# Altium PCB Pcb_BAT_HOLD_V2_GLC_RULES.PcbDoc
Units mm, origin at the board's own origin, x right, y up, seen from the top; angles counter-clockwise.
Board outline 100 x 70 mm, 2 copper layers (Top Layer, Bottom Layer); 2 components, 28 nets, 14 pads, 0 vias.
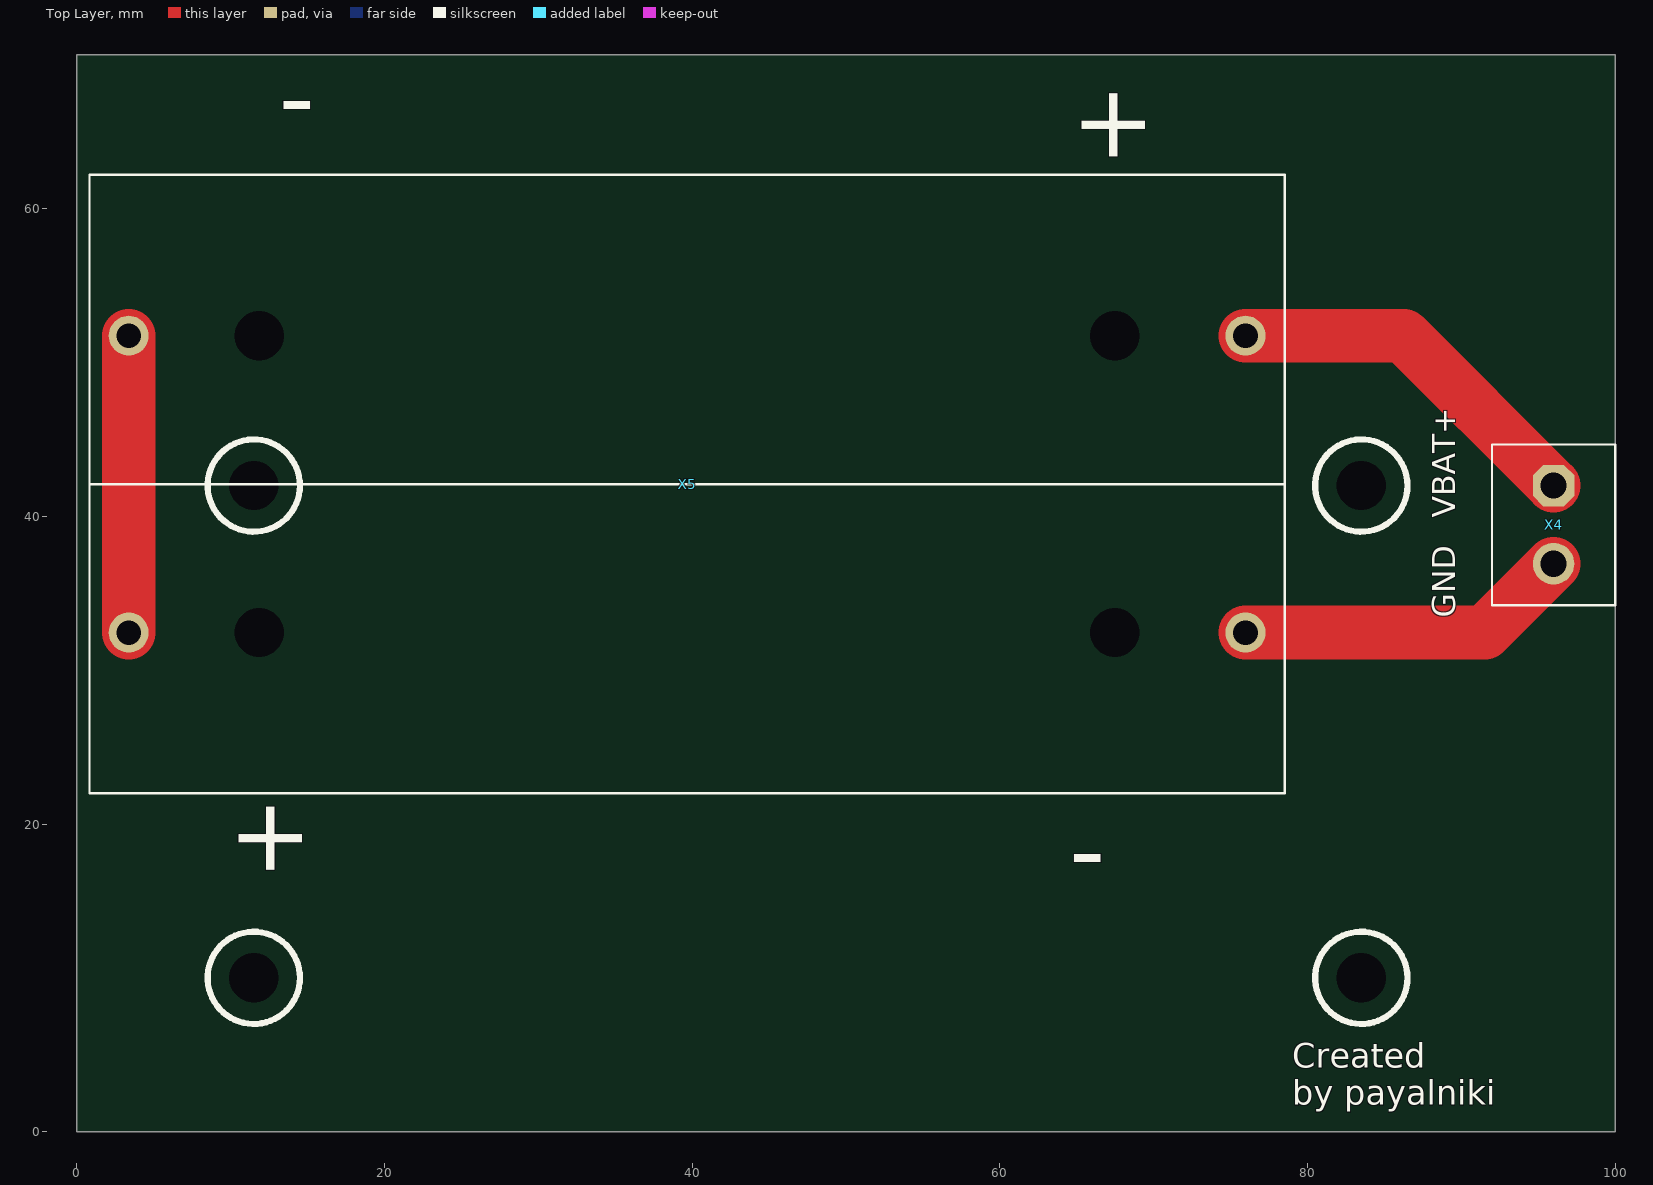
[diagram p0: Top Layer view]
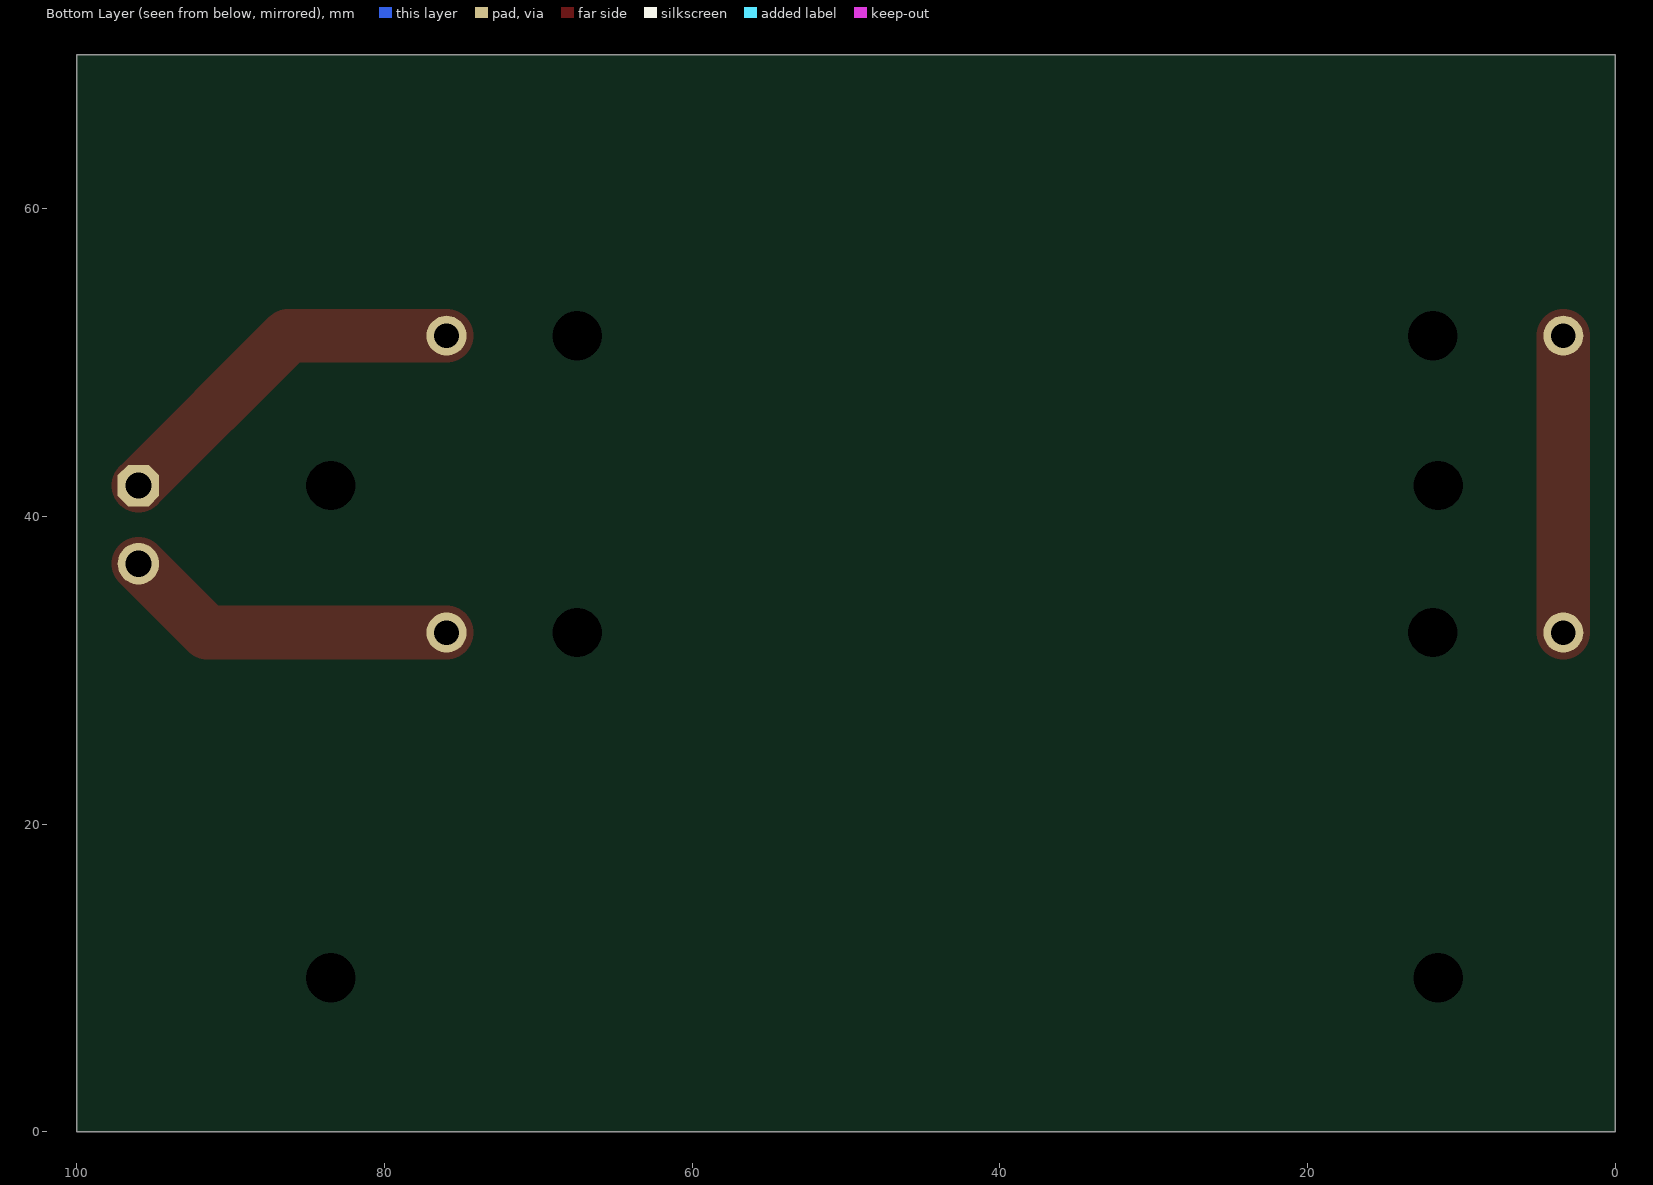
[diagram p1: Bottom Layer view, seen from below]

## Layer stack, top to bottom
Top Solder: solder mask 0.0102, Solder Resist, Dk 3.5
Top Layer: signal copper 0.0356
Dielectric 1: dielectric 0.32, FR-4, Dk 4.8
Bottom Layer: signal copper 0.0356
Bottom Solder: solder mask 0.0102, Solder Resist, Dk 3.5

## Board outline
0,0 100,0 100,70 0,70

## Design rules (kind name [scope] priority, off if disabled: settings)
BoardOutlineClearance [All] p1: gap=0.2 ignorepadtopadclearanceinfootprint=FALSE except(0.4: Arc-SplitBarrior Arc-SplitContinuation Track-SplitBarrior Track-SplitContinuation SMDPad-SplitBarrior SMDPad-SplitContinuation THPad-SplitBarrior THPad-SplitContinuation Via-SplitBarrior Via-SplitContinuation Fill-SplitBarrior Fill-SplitContinuation Poly-SplitBarrior Poly-SplitContinuation Region-SplitBarrior Region-SplitContinuation Text-SplitBarrior Text-SplitContinuation)
Clearance "Clearance Bottom Layer" [OnLayer('Bottom Layer')] p1: gap=0.203 ignorepadtopadclearanceinfootprint=TRUE except(0.254: Arc-Text Track-Text SMDPad-Text THPad-Text Via-Text Fill-Text Poly-Text Region-Text Text-Text)
Clearance "Clearance Top Layer" [OnLayer('Top Layer')] p2: gap=0.203 ignorepadtopadclearanceinfootprint=TRUE except(0.254: Arc-Text Track-Text SMDPad-Text THPad-Text Via-Text Fill-Text Poly-Text Region-Text Text-Text)
Clearance [All] p3: gap=0.2 ignorepadtopadclearanceinfootprint=FALSE except(0.089: Arc-Arc Arc-Track Arc-SMDPad Track-Track Track-SMDPad SMDPad-SMDPad; 0.127: Arc-Via Track-Via SMDPad-Via THPad-Via Via-Via; 0.254: Arc-Text Track-Text SMDPad-Text THPad-Text Via-Text Fill-Text Poly-Text Region-Text Text-Text)
HoleSize [All] p1: absolutevalues=TRUE maxlimit=6.3 minlimit=0.2 maxpercent=80.000 minpercent=20.000
MinimumAnnularRing [All] p1: minimumring=0.076
MinimumSolderMaskSliver [All] p1: minsoldermaskwidth=0.05
PolygonConnect PolygonConnect_1 [All] p1: thpad.connectstyle=Relief thpad.reliefconductorwidth=0.508 thpad.reliefentries=4 thpad.polygonreliefangle="90 Angle" thpad.airgapwidth=0.254 smdpad.connectstyle=Relief smdpad.reliefconductorwidth=0.508 smdpad.reliefentries=4 smdpad.polygonreliefangle="90 Angle" smdpad.airgapwidth=0.254 via.connectstyle=Direct via.reliefconductorwidth=0.508 via.reliefentries=4 via.polygonreliefangle="90 Angle" via.airgapwidth=0.254
RoutingCorners [All] p1: cornerstyle=Round minsetback=2.54 maxsetback=2.54
RoutingVias [All] p1: holewidth=0.5 width=1 viastyle="Through Hole" minholewidth=0.2 minwidth=0.45 maxholewidth=1 maxwidth=2
SilkToSilkClearance [All] p1: silktosilkclearance=0.1
SilkToSolderMaskClearance [IsPad] p1: minsilkscreentomaskgap=0.1 clearancetoexposedcopper=TRUE
SolderMaskExpansion [All] p1: expansion=0.102 istentingtop=FALSE
Width [All] p1: maxlimit=3.5 minlimit=0.089 preferedwidth=0.8 minimp=50.000000 maximp=50.000000 favimp=50.000000
25 further rules are at their usual default settings.

## Components (designator, comment, footprint, x,y, rotation, side; value= is the part's Value field where it differs from the comment)
X4 "" KLS2-EDV-5.08-02P-4 96,42 r270 top
X5 "Держатель батарейки" "Держатель батарейки" 67.478,51.745 r180 top (schematic designator X4)

## Footprints (in the part's own frame and the unit in brackets; to place one, negate y for a bottom-side part, rotate by r counter-clockwise, add the part's x,y. Pads: shape width x height; smd on the part's side, far side on the other; paste and mask are expansions set on the pad)
KLS2-EDV-5.08-02P-4 [mm]
  oct 2.7x2.7 hole 1.7: 1(0,0)
  round 2.7 hole 1.7: 2(5.08,0)
  silkscreen extent -2.68,-4 7.78,4
"Держатель батарейки" [mm]
  round 2.6 hole 1.6: 1(-8.49,19.3) 2(-8.49,0) ""(64.11,0) ""(64.11,19.3)
  round 0 hole 3.2 unplated mask+1: ""(0,19.3) ""(0,0) ""(55.62,0) ""(55.62,19.3)
  Top Layer lines w3.5: 64.11,19.3 64.11,0
  silkscreen extent -11.04,-10.45 66.66,29.76

## Part data
X4: library part "Держатель батарейки"

## Free pads (board coordinates)
  round 1 hole 3.2 unplated: K1(11.5,10) K2(11.5,42) K3(83.5,42) K4(83.5,10)

## Nets (pads, with @x,y where several pads share a name; then routed paths per layer and width w, separated by ;. In a path a pad name is that pad's centre, name@x,y a point inside that pad or via, vN(x,y) a via of type N, cw(c..) or ccw(c..) an arc to the next point about the centre after c; other vN are vias at no path point)
3.3V_IN1: 
3.3V_IN2: 
5V_OUT: 
GND: X4.2 X5.1 | length 21.9
  Top Layer w3.5: X5.1 91.525,32.445 X4.2
"HIGH CURRENT": 
NetC1_1: 
NetDA1_1: 
NetDA1_3: 
NetHL1_2: 
NetR1_1: 
NetR1_2: 
NetR2_2: 
NetR4_2: 
NetR5_1: 
NetR5_2: 
NetR6_1: 
NetR8_2: 
NetR9_2: 
NetR10_2: 
NetR11_1: 
NetR11_2: 
NetSB1_1: 
NetU1_11: X4.1 X5.2 | length 24.1
  Top Layer w3.5: X5.2 86.255,51.745 X4.1
NetU1_A1: 
NetVD5_2: 
NetVT2_3: 
SDN_SIG_1: 
SDN_SIG_2: 
pads on no net: X5.

## Silkscreen, mask and mechanical layers (free items; w line width, h text height)
Top Overlay:
  circle w0.4: c83.5,42 r3
  circle w0.4: c11.5,42 r3
  circle w0.4: c83.5,10 r3
  circle w0.4: c11.5,10 r3
  text "-" at 15.5,68.5 h4.8 r180
  text "+" at 65.333,68.2 h4.8 r270
  text "VBAT+" at 89.6,39.9 h1.5 r90
  text "GND" at 89.6,33.4 h1.5 r90
  text "+" at 14.667,16.3 h4.8 r90
  text "-" at 64.5,16 h4.8
  text "Created  / by payalniki" at 79,1.751 h1.6
Bottom Overlay:
  text "Ein Unfall mit Hochspannung bewirkt hauptsächlich eine thermische Schädigung des Gewebes, also eine Verbrennung. Die wirkenden Stromstärken liegen meist sehr viel höher als bei Niederspannungsunfällen und zugleich treten sehr heiße Störlichtbögen auf, die unter Umständen den menschlichen Körper überbrücken können. Beispielsweise führt eine Annäherung an eine Hochspannungsleitung mit 30 Kilovolt, wie sie im Bereich von Mittelspannungsnetzen üblich sind, zu einem Lichtbogen und bei einem angenommenen Körperwiderstand von 5 kΩ fließt kurzzeitig ein Strom von etwa 6 Ampere durch den Körper. Dabei tritt eine thermische Leistung von rund 180 Kilowatt auf. Durch diese hohe Leistung kommt es zu einer fast schlagartigen Verdampfung von wasserhaltigem Gewebe im Bereich des Stromeintritts- bzw. Stromaustrittspunktes. Dabei treten an den Ein- und Austrittstellen sogenannte Strommarken im Gewebe auf.Ein Unfall mit Hochspannung bewirkt hauptsächlich eine thermische Schädigung des Gewebes, also eine Verbrennung. Die wirkenden Stromstärken liegen meist sehr viel höher als bei Niederspannungsunfällen und zugleich treten sehr heiße Störlichtbögen auf, die unter Umständen den menschlichen Körper überbrücken können. Beispielsweise führt eine Annäherung an eine Hochspannungsleitung mit 30 Kilovolt, wie sie im Bereich von Mittelspannungsnetzen üblich sind, zu einem Lichtbogen und bei einem angenommenen Körperwiderstand von 5 kΩ fließt kurzzeitig ein Strom von etwa 6 Ampere durch den Körper. Dabei tritt eine thermische Leistung von rund 180 Kilowatt auf. Durch diese hohe Leistung kommt es zu einer fast schlagartigen Verdampfung von wasserhaltigem Gewebe im Bereich des Stromeintritts- bzw. Stromaustrittspunktes. Dabei treten an den Ein- und Austrittstellen sogenannte Strommarken im Gewebe auf.Ein Unfall mit Hochspannung bewirkt hauptsächlich eine thermische Schädigung des Gewebes, also eine Verbrennung. Die wirkenden Stromstärken liegen meist sehr viel höher als bei Niederspannungsunfällen und zugleich treten sehr heiße Störlichtbögen auf, die unter Umständen den menschlichen Körper überbrücken können. Beispielsweise führt eine Annäherung an eine Hochspannungsleitung mit 30 Kilovolt, wie sie im Bereich von Mittelspannungsnetzen üblich sind, zu einem Lichtbogen und bei einem angenommenen Körperwiderstand von 5 kΩ fließt kurzzeitig ein Strom von etwa 6 Ampere durch den Körper. Dabei tritt eine thermische Leistung von rund 180 Kilowatt auf." at 98.5,0 h1.12
Mechanical 15:
  the board outline again, w0.2